# Altium PCB Encoder_M_v1.PcbDoc
Units mm, origin at the board's own origin, x right, y up, seen from the top; angles counter-clockwise.
Board outline 30 x 30 mm, 2 copper layers (Top Layer, Bottom Layer), stack 1.571 mm thick; 8 components, 7 nets, 36 pads, 17 vias.
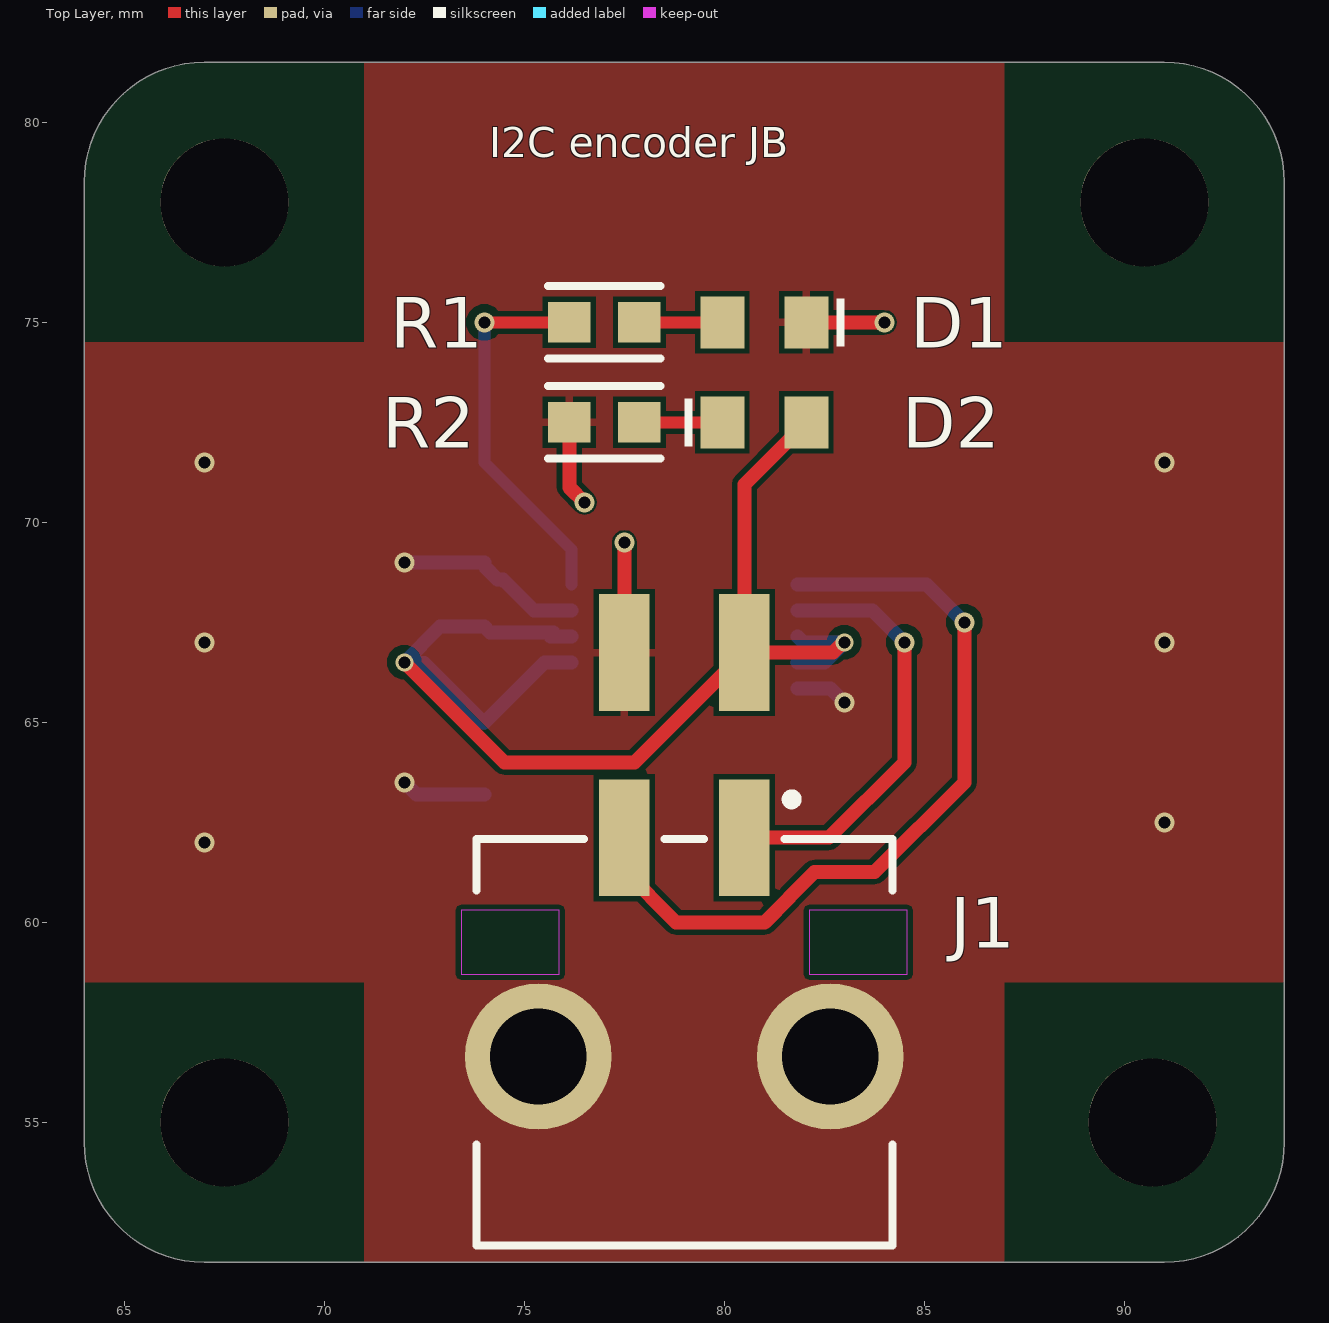
[diagram p0: Top Layer view]
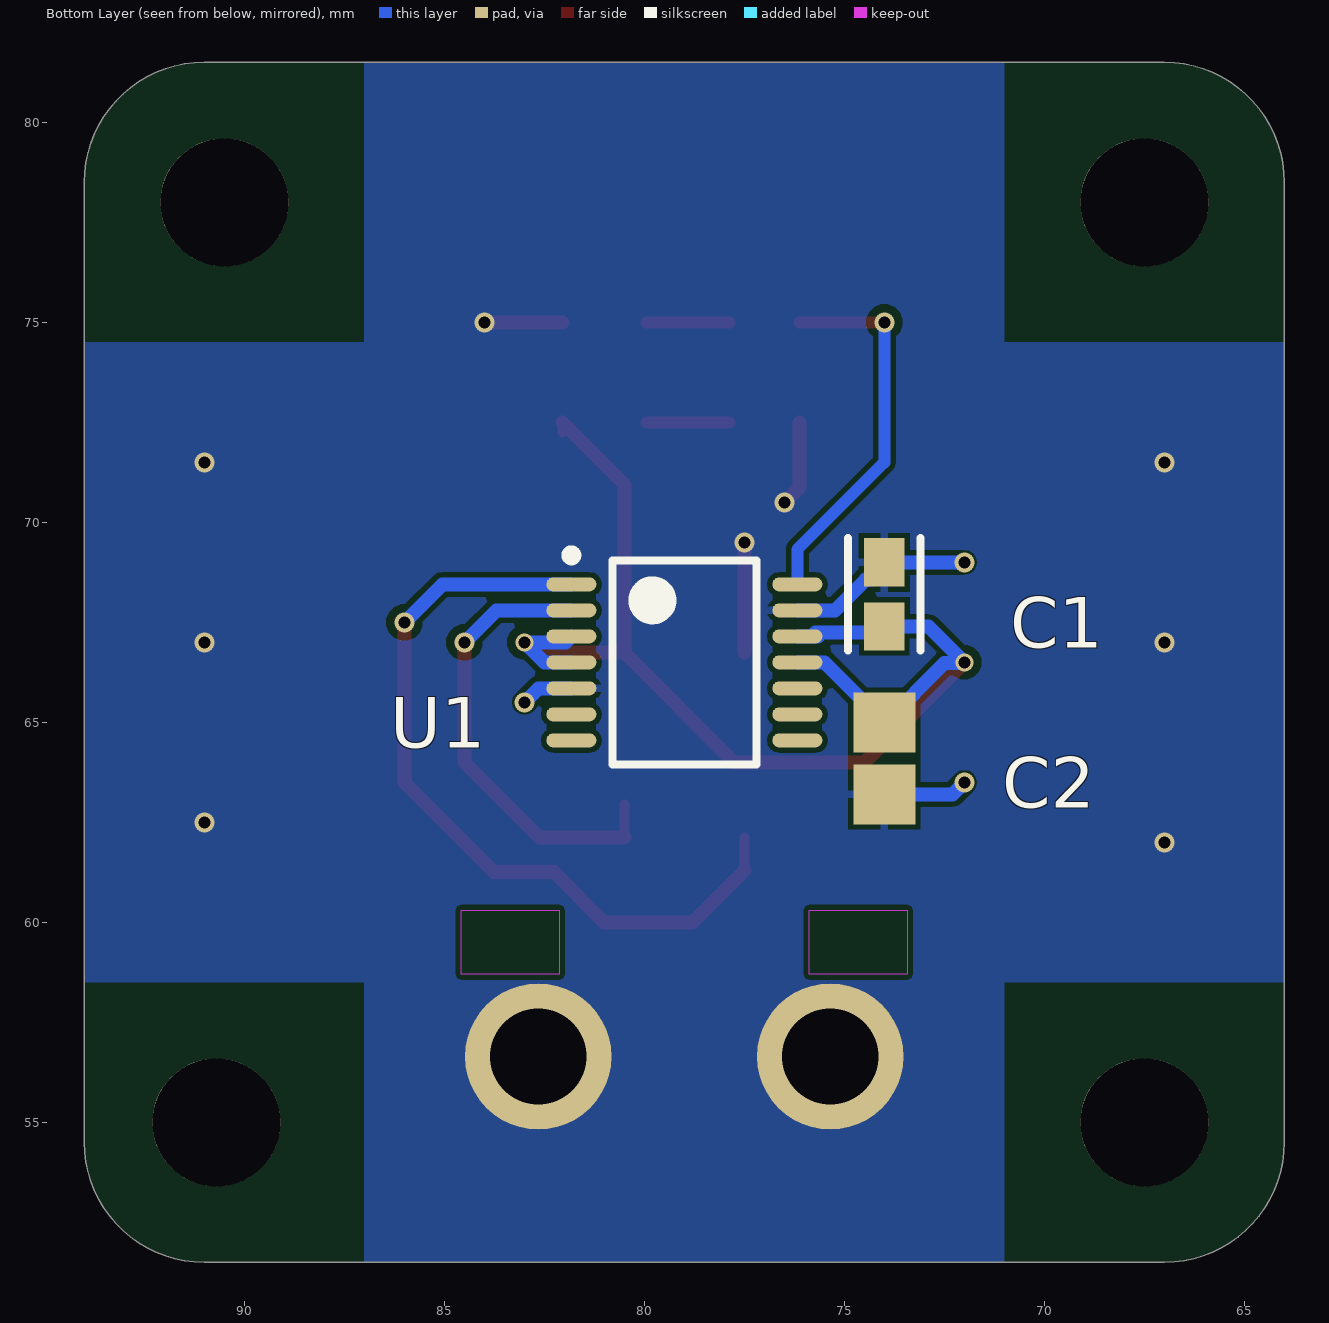
[diagram p1: Bottom Layer view, seen from below]
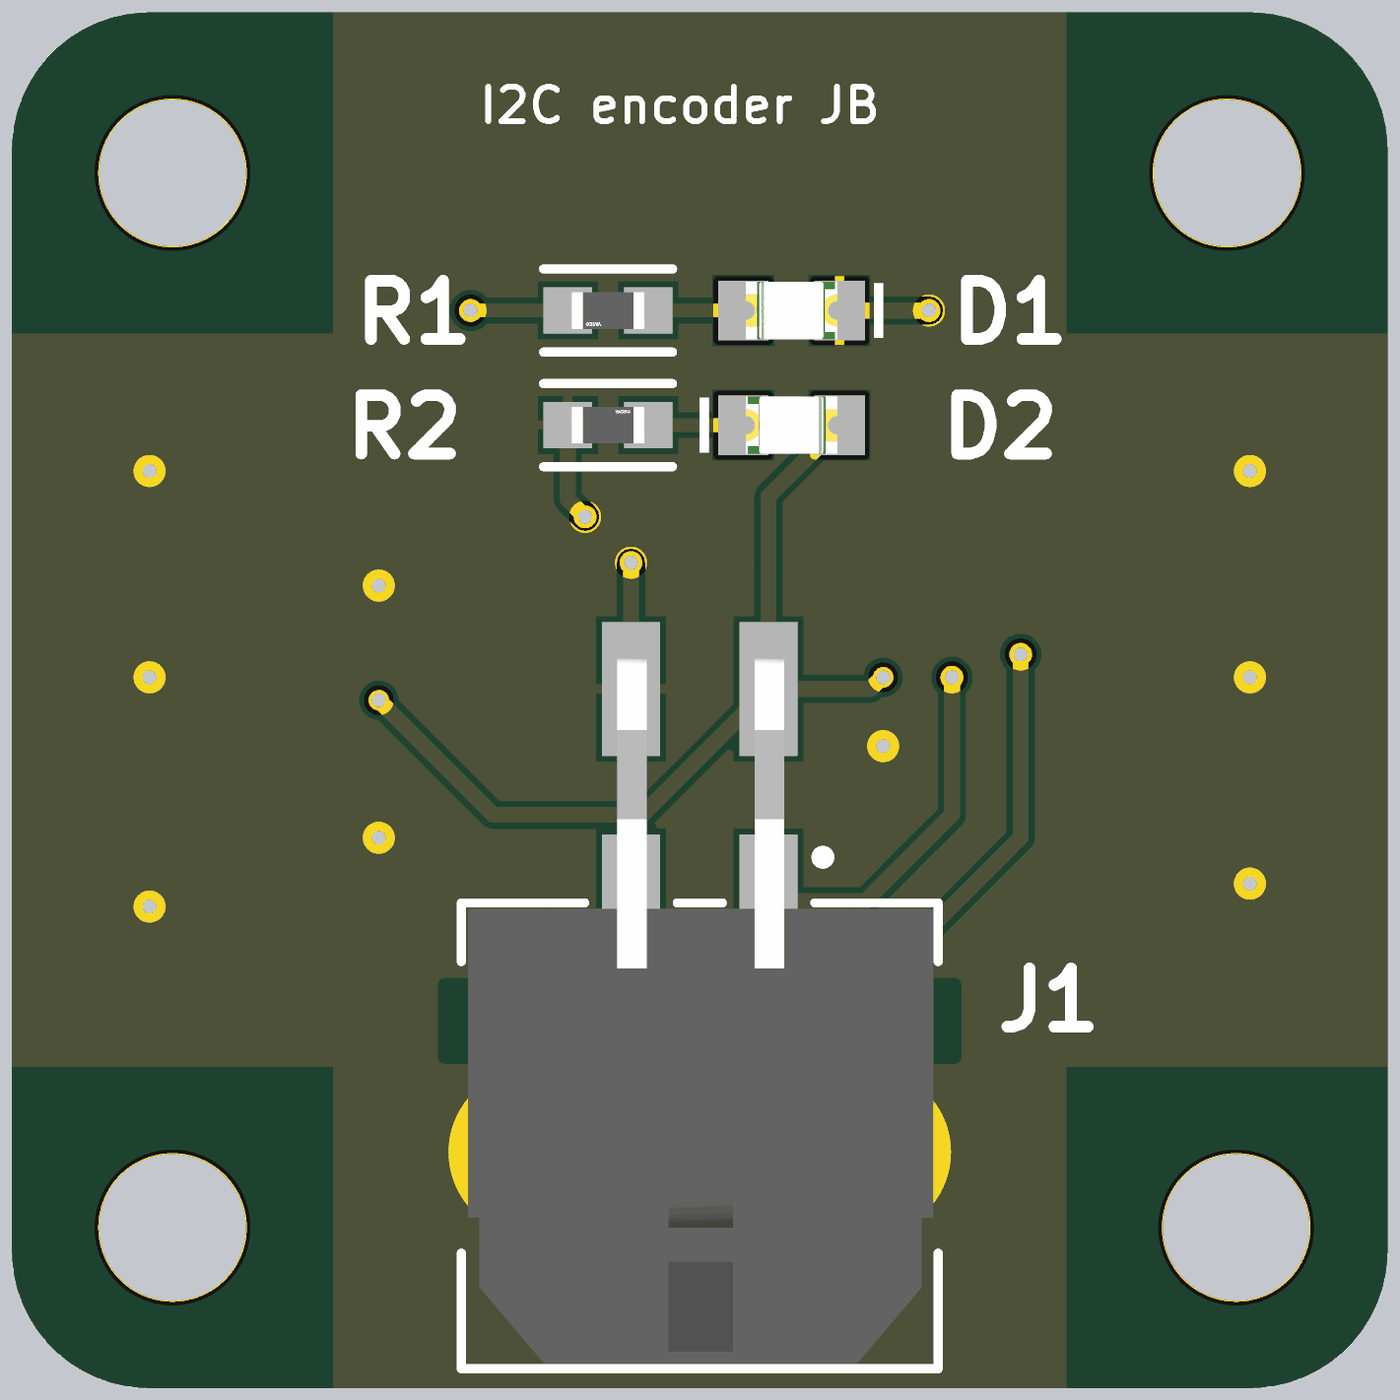
[diagram p2: 3D render of the assembled board from above, using the file's embedded part models]

## Layer stack, top to bottom
Top Solder: solder mask 0.0102, Solder Resist, Dk 3.5
Top Layer: signal copper 0.0356
Dielectric 1: dielectric 1.5, FR-4, Dk 4.8
Bottom Layer: signal copper 0.0356
Bottom Solder: solder mask 0.0102, Solder Resist, Dk 3.5

## Board outline
64,54.5 64,78.5 cw(c67,78.5) 67,81.5 91,81.5 cw(c91,78.5) 94,78.5 94,54.5 cw(c91,54.5) 91,51.5 67,51.5 cw(c67,54.5)

## Design rules (kind name [scope] priority, off if disabled: settings)
Clearance Clearance_POWER [(InNet('NetC205_2') OR InNet('NETC203_2') OR InNet('NETC206_2') OR InNet('NetP410_1') OR InNet('NetP410_3') OR InNet('VM'))] p1: gap=0.254 ignorepadtopadclearanceinfootprint=FALSE except(0: SMDPad-Hole THPad-Hole Via-Hole Fill-Hole Poly-Hole Region-Hole Text-Hole; 0.1: Arc-Arc Arc-Track Track-Track; 0.127: Arc-THPad Arc-Fill Arc-Poly Arc-Region Track-THPad Track-Fill Track-Poly Track-Region SMDPad-SMDPad; 0.2: Arc-SMDPad Track-SMDPad; 0.5: THPad-THPad THPad-Fill THPad-Poly THPad-Region Fill-Fill Fill-Poly Fill-Region Poly-Poly Poly-Region Region-Region)
Clearance [All] p2: gap=0.127 ignorepadtopadclearanceinfootprint=FALSE except(0: SMDPad-Hole THPad-Hole Via-Hole Fill-Hole Poly-Hole Region-Hole Text-Hole; 0.1: Arc-Arc Arc-Track Track-Track; 0.2: Arc-SMDPad Track-SMDPad THPad-Fill THPad-Poly THPad-Region Via-Fill Via-Poly Via-Region; 0.254: Arc-Via Arc-Text Arc-Hole Track-Via Track-Text Track-Hole SMDPad-THPad SMDPad-Via SMDPad-Text THPad-Via THPad-Text Via-Via Via-Text Fill-Text Poly-Text Region-Text Text-Text; 0.5: THPad-THPad)
ComponentClearance [All] p1: gap=0.127 collisioncheckmode=3 verticalgap=0.254 showdistances=FALSE
HoleSize [All] p1: absolutevalues=TRUE maxlimit=6.5 minlimit=0.025 maxpercent=80.000 minpercent=20.000
MinimumSolderMaskSliver [All] p1: minsoldermaskwidth=0.08
PlaneClearance [All] p1: clearance=0.2
PlaneConnect [All] p1: planeconnectstyle=Direct reliefexpansion=0.508 reliefentries=4 reliefconductorwidth=0.254 reliefairgap=0.254
PolygonConnect PolygonConnect_GND_POWER [InNet('GND') vs (HasFootprint('FP-FC-G-MFG') OR HasFootprint('FP-CL32-IPC_B') OR HasFootprint('TSON Advance_TOS') OR HasFootprint('XT60+MR60') OR HasFootprint('XT-60') OR HasFootprint('FP-SMAJ-CA-MFG') OR InNamedPolygon('NONET_L01_P000'))] p1: connectstyle=Direct reliefconductorwidth=0.254 reliefentries=4 polygonreliefangle="90 Angle" airgapwidth=0.254
PolygonConnect PolygonConnect_GND [InNet('GND')] p2: thpad.connectstyle=Direct thpad.reliefconductorwidth=0.254 thpad.reliefentries=4 thpad.polygonreliefangle="90 Angle" thpad.airgapwidth=0.254 smdpad.connectstyle=Relief smdpad.reliefconductorwidth=0.2 smdpad.reliefentries=4 smdpad.polygonreliefangle="90 Angle" smdpad.airgapwidth=0.127 via.connectstyle=Direct via.reliefconductorwidth=0.254 via.reliefentries=4 via.polygonreliefangle="90 Angle" via.airgapwidth=0.254
PolygonConnect [All] p3: connectstyle=Direct reliefconductorwidth=0.254 reliefentries=4 polygonreliefangle="90 Angle" airgapwidth=0.254
RoutingVias [All] p1: holewidth=0.3 width=0.45 viastyle="Through Hole" minholewidth=0.3 minwidth=0.45 maxholewidth=0.55 maxwidth=0.7
SilkToSilkClearance [All] p1: silktosilkclearance=0
SilkToSolderMaskClearance [IsPad] p1: minsilkscreentomaskgap=0.15 clearancetoexposedcopper=TRUE
SolderMaskExpansion [All] p1: expansion=0.1 istentingtop=FALSE
SupplyNets "Schematic Supply Nets_3" [InNet('3V3')] p1: voltage=0.000
SupplyNets "Schematic Supply Nets" [InNet('GND')] p2: voltage=0.000
Width Width_voltage [InNetClass('Voltage')] p1: maxlimit=0.5 minlimit=0.18 preferedwidth=0.18 minimp=50.000000 maximp=50.000000 favimp=50.000000
Width [All] p2: maxlimit=0.5 minlimit=0.127 preferedwidth=0.18 minimp=50.000000 maximp=50.000000 favimp=50.000000
23 further rules are at their usual default settings.

## Components (designator, comment, footprint, x,y, rotation, side; value= is the part's Value field where it differs from the comment)
C1 "10uF" FP-GRM188-0_1-e0_2_0_55-IPC_A 74,68.198 r90 bottom
C2 "100nF" CAPC2013X140X50ML20T25 74,64.1 r90 bottom
D1 "150080SS75000" WL-SMCW_0805_150080xx75000 81,75 r180 top
D2 "150080SS75000" WL-SMCW_0805_150080xx75000 81,72.5 r0 top
J1 "43045-0406" FP-43045-0406-MFG 79,57 r0 top
R1 "1k" FP-RC0603-0_55-IPC_A 77,75 r180 top
R2 "1k" FP-RC0603-0_55-IPC_A 77,72.5 r0 top
U1 "AS5048B-HTSP" AMS-TSSOP-14-5000X4400DE_L 79,66.5 r180 bottom

## Footprints (in the part's own frame and the unit in brackets; to place one, negate y for a bottom-side part, rotate by r counter-clockwise, add the part's x,y. Pads: shape width x height; smd on the part's side, far side on the other; paste and mask are expansions set on the pad)
AMS-TSSOP-14-5000X4400DE_L [mm] "TSOP, 14-Leads, Body 5.00x4.40mm, Pitch 0.65mm, IPC High Density"
  oval 1.25x0.35 smd: 1(-2.825,1.95) 2(-2.825,1.3) 3(-2.825,0.65) 4(-2.825,0) 5(-2.825,-0.65) 6(-2.825,-1.3) 7(-2.825,-1.95) 8(2.825,-1.95) 9(2.825,-1.3) 10(2.825,-0.65) 11(2.825,0) 12(2.825,0.65) 13(2.825,1.3) 14(2.825,1.95)
  silkscreen extent -2.95,-2.55 1.8,2.8, body extent -2.25,-2.55 2.25,2.55, height 1.2
CAPC2013X140X50ML20T25 [mm] "Chip Capacitor, 2-Leads, Body 2.00x1.25mm, IPC Low Density"
  rect 1.5x1.55 smd: 1(-0.9,0) 2(0.9,0)
  body extent -1.1,-0.72 1.1,0.72, height 1.4
FP-43045-0406-MFG [mm]
  rect 1.27x2.92 smd paste+0 mask+0: 1(1.5,5.115) 2(-1.5,5.115) 3(1.5,9.745) 4(-1.5,9.745)
  round 3.66 hole 2.41 paste-2539.97 mask+0: 5(-3.65,-0.355) 6(3.65,-0.355)
  Keep-Out Layer region: -5.575,1.705 -3.125,1.705 -3.125,3.305 -5.575,3.305
  Keep-Out Layer region: 3.125,1.705 5.575,1.705 5.575,3.305 3.125,3.305
  silkscreen extent -5.2,-5.08 5.2,6.2, body extent -5.58,-5.18 5.58,11.3, height 0.25
FP-GRM188-0_1-e0_2_0_55-IPC_A [mm]
  rect 1.208x1.012 smd paste+0 mask+0: 1(-0.802,0) 2(0.802,0)
  silkscreen extent -1.41,-0.91 1.41,0.91, body extent -0.8,-0.4 0.8,0.4, height 0.9
FP-RC0603-0_55-IPC_A [mm]
  rect 1.059x1.012 smd paste+0 mask+0: 1(-0.877,0) 2(0.877,0)
  silkscreen extent -1.41,-0.91 1.41,0.91, body extent -1.91,-1.01 1.91,1.01, height 0.25
WL-SMCW_0805_150080xx75000 [mm] "SMD Mono-color Chip LED, body 2.0x1.25mm"
  rect 1.1x1.3 smd: 1(-1.05,0) 2(1.05,0)
  silkscreen extent -2,-0.6 -1.8,0.6, body extent -1,-0.63 1,0.62, height 0.7

## Part data
C1: library part CMP-2006-02792-2, "Chip Multilayer Ceramic Capacitors for General Purpose, 0603, 10uF, X5R, 15%, 20%, 6.3V", Case Code (Imperial)=0603, Case Code (Metric)=1608, Dielectric=X5R, Max Operating Temperature=85°C, Min Operating Temperature=-55°C, Package Quantity=4000, Tolerance=20%, Voltage=6.3V, Capacitance=10uF, Case/Package=0603, Depth=0.8mm, Height=0.8mm, Lead Free="Lead Free", Length=1.6mm, Material=Ceramic, Mount="Surface Mount", Packaging="Tape and Reel", Radiation Hardening=No, REACH SVHC="No SVHC", Termination=SMD/SMT, Thickness=0.035inch, Voltage Rating=6.3V, Voltage Rating (DC)=6.3V, Width=0.031inch
C2: library part CMP-2007-04784-1, Manufacturer="AVX Interconnect / Elco", Part Number=08055F104KAT2A
D1 D2: library part CMP-1426-00010-4, "Led, Red, 630 Nm, 1.9 V, 30 Ma, 60 Mcd Rohs Compliant: Yes", Case Code (Imperial)=0805, Case Code (Metric)=2012, Color=Red, Forward Current=100mA, Forward Voltage=1.9V, Max Junction Temperature (Tj)=95°C, Max Operating Temperature=85°C, Max Reverse Voltage (DC)=5V, Min Operating Temperature=-40°C, Power Dissipation=72mW, Test Current=20mA, Case/Package=0805, Dominant Wavelength=630nm, Height=700µm, Length=2mm, Lens Style="Clear, Rectangular", Luminous Intensity=60mcd, Mount="Surface Mount", Packaging="Tape and Reel", Peak Wavelength=645nm, REACH SVHC=Unknown, Reverse Voltage=5V, RoHS=Compliant, Viewing Angle=140°, Wavelength=630nm, Width=1.25mm
J1: library part CMP-04776-000244-1, "CONN HEADER SMD R/A 4POS 3MM", Case/Package=0406, Color=Black, Contact Resistance=10mR, Current Rating=5A, Flammability Rating="UL94 V-0", Max Operating Temperature=105°C, Max Voltage Rating (DC)=250.25kV, Min Operating Temperature=-40°C, Package Quantity=1800, Voltage Rating=600V, Voltage Rating (DC)=250V, Contact Material=Brass, Contact Plating=Tin, Gender=Male, Glow Wire Compliant=Compliant, Halogen Free="Low Halogen", Housing Material=Thermoplastic, Mount="Surface Mount", Number of Circuits=4, Number of Contacts=4, Number of Positions=4, Number of Rows=2, Orientation="Right Angle", Packaging="Tape and Reel", Pitch=3mm, RoHS Compliant=Yes, Row Spacing=3mm, Series="Micro-Fit 3.0", Termination=SMD/SMT
R1 R2: library part CMP-1659-00009-5, "RES 1K OHM 1% 1/10W 0603", Case Code (Imperial)=0603, Case Code (Metric)=1608, Max Operating Temperature=155°C, Max Power Dissipation=100mW, Min Operating Temperature=-55°C, Resistance=1kR, Resistance Tolerance=1%, Resistor Type="Thick Film", Temperature Coefficient=100ppm/°C, Voltage Rating=50V, Case/Package=0603, Construction=Rectangular, Contact Plating=Tin, Depth=0.8mm, Features="Moisture Resistant", Height=0.45mm, Lead Free="Lead Free", Length=1.6mm, Military Standard=Not, Number of Terminations=2, Packaging="Tape and Reel", Power Rating=100mW, Radiation Hardening=No, REACH SVHC="No SVHC", RoHS Compliant=Yes, Series=RC, Size Code=0603, Technology="THICK FILM", Termination=SMD/SMT, Tolerance=1%
U1: library part CMP-0555-00031-2, "Magnetic Rotary Encoder 14-bit Angular Position Sensor, 3.3 or 5 V, TSSOP-14, Pb-Free, Reel", Manufacturer=AMS, Supply Voltage (V)="3.3 or 5.0", Code_JEDEC=MO-153, ComponentLink1Description="Manufacturer URL", ComponentLink1URL=www.ams.com, ComponentLink2Description=Datasheet, ComponentLink2URL=http://www.ams.com/eng/content/download/438523/1341157/143016, DatasheetVersion="Rev. 1.3", Features="IÂ²C, PWM, In System Programmable", Mounting Technology="Surface Mount", Output="IÂ²C, PWM", PackageDescription="14-Pin Small Outline Package, 5 x 4.4 mm Body, 0.65 mm Pitch", PackageReference=TSSOP-14, PackageVersion="Rev. 2.7, 10/2010", PartNumber=AS5048B-HTSP, Resolution=14-bit

## Free pads (board coordinates)
  round 3.2 hole 3.2: ""(67.5,55) ""(67.5,78) ""(90.5,78) ""(90.7,55)

## Via types
v1: diameter 0.5, hole 0.3, Top Layer to Bottom Layer, 15 vias
v2: diameter 0.45, hole 0.3, Top Layer to Bottom Layer, 2 vias

## Nets (pads, with @x,y where several pads share a name; then routed paths per layer and width w, separated by ;. In a path a pad name is that pad's centre, name@x,y a point inside that pad or via, vN(x,y) a via of type N, cw(c..) or ccw(c..) an arc to the next point about the centre after c; other vN are vias at no path point)
3V3: C1.1 C2.2 D2.2 J1.3 U1.3 U1.4 U1.11 U1.12 | length 33.2
  Top Layer w0.25: D2.2@82.05,72.248 D2.2
  Top Layer w0.35: v2(72,66.5) 74.5,64 77.755,64 J1.3 ; D2.2 80.5,70.95 J1.3 ; v2(83,67) 82.973,67 82.718,66.745 J1.3
  Bottom Layer w0.35: U1.12@75.656,67.15 U1.12 75.725,67.15 75.725,67.25 74.146,67.25 C1.1 72.896,67.396 v2(72,66.5) 72.019,66.481 72.494,66.481 73.975,65 C2.2 75.5,66.5 U1.11 ; U1.4 82.5,66.5 v2(83,67) 81.975,67 U1.3
GND: C1.2 C2.1 D1.1 J1.4 J1.5 J1.6 R2.1 U1.5 U1.13 | length 15
  Top Layer w0.35: R2.1 76.123,70.877 v1(76.5,70.5) ; J1.4 v1(77.5,69.5) ; D1.1 v1(84,75)
  Bottom Layer w0.35: v1(72,63.5) 72.3,63.2 C2.1 ; v1(72,69) C1.2 74,68.902 74.331,68.571 74.465,68.571 74.536,68.5 75.237,67.8 U1.13 ; U1.5 82.65,65.85 v1(83,65.5)
  other v1: 67,62 91,62.5 67,67 91,67 67,71.5 91,71.5
NetD1_2: D1.2 R1.1 | length 2.1
  Top Layer w0.3: R1.1@77.875,75 D1.2
NetD2_1: D2.1 R2.2 | length 2.1
  Top Layer w0.3: R2.2@77.875,72.5 D2.1
PWM: R1.2 U1.14 | length 9.6
  Top Layer w0.3: v1(74,75) R1.2
  Bottom Layer w0.3: v1(74,75) 74,71.5 76.175,69.325 U1.14
SCL: J1.1 U1.2 | length 11.6
  Top Layer w0.25: J1.1 J1.1@80.5,62.94
  Top Layer w0.35: J1.1 82.615,62.115 84.5,64 v1(84.5,67)
  Bottom Layer w0.35: U1.2 83.7,67.8 v1(84.5,67)
SDA: J1.2 U1.1 | length 19.9
  Top Layer w0.25: J1.2@77.5,61.29 77.5,61.5 J1.2
  Top Layer w0.35: J1.2@77.5,61.29 78.79,60 81.01,60 81.633,60.622 81.633,60.633 82.255,61.255 83.755,61.255 86,63.5 v1(86,67.5)
  Bottom Layer w0.35: U1.1 85.05,68.45 v1(86,67.5)
pads on no net: U1.6 U1.7 U1.8 U1.9 U1.10

## Polygon pours and split planes (outlines as drawn)
GND on Top Layer "GND_L01_P012" (solid, pour order 12): 64,74.5 64,58.5 71,58.5 71,51.5 87,51.5 87,58.5 94,58.5 94,74.5 87,74.5 87,81.5 71,81.5 71,74.5
GND on Bottom Layer "GND_L02_P011" (solid, pour order 11): 94,58.5 87,58.5 87,51.5 71,51.5 71,58.5 64,58.5 64,74.5 71,74.5 71,81.5 87,81.5 87,74.5 94,74.5

## Other copper
Top Layer:
  pour cut-out: 64,51.5 64,58.5 71,58.5 71,51.5
  pour cut-out: 64,74.5 64,81.5 71,81.5 71,74.5
  pour cut-out: 87,74.5 87,81.5 94,81.5 94,74.5
  pour cut-out: 87,51.5 87,58.5 94,58.5 94,51.5
Bottom Layer:
  pour cut-out: 87,51.5 87,58.5 94,58.5 94,51.5
  pour cut-out: 87,81.5 94,81.5 94,74.5 87,74.5
  pour cut-out: 71,74.5 71,81.5 64,81.5 64,74.5
  pour cut-out: 71,51.5 71,58.5 64,58.5 64,51.5

## Silkscreen, mask and mechanical layers (free items; w line width, h text height)
Top Overlay:
  text "I2C encoder JB" at 74.125,79.125 h0.75
Mechanical 1:
  the board outline again, w0.254

## Dimensions
91,51.5 to 88,58.5 on Mechanical 1
94,54.5 to 87,57 on Mechanical 1
94,78.5 to 90.5,78 on Mechanical 1
91,78.5 to 100,80.5 on Mechanical 1
64,78.5 to 94,78.5 on Mechanical 1
67,81.5 to 67,51.5 on Mechanical 1